# EAGLE board RFM69-ESP-03-v1.0-panel (EAGLE 7.7.0)
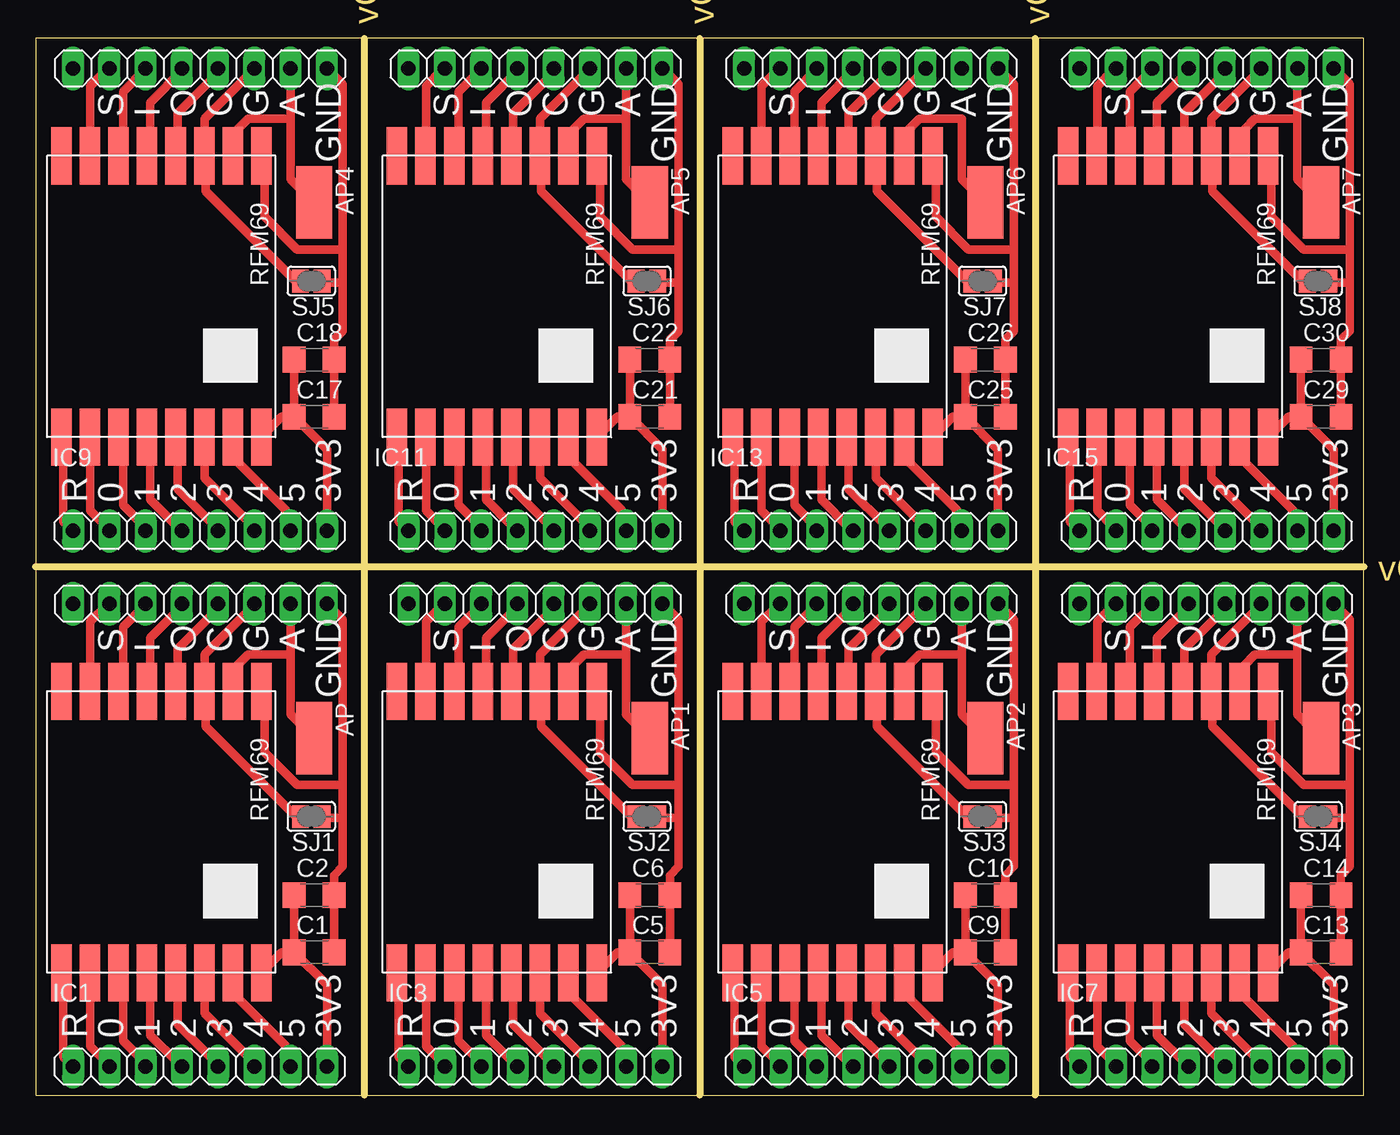
[diagram p0: board, top side]
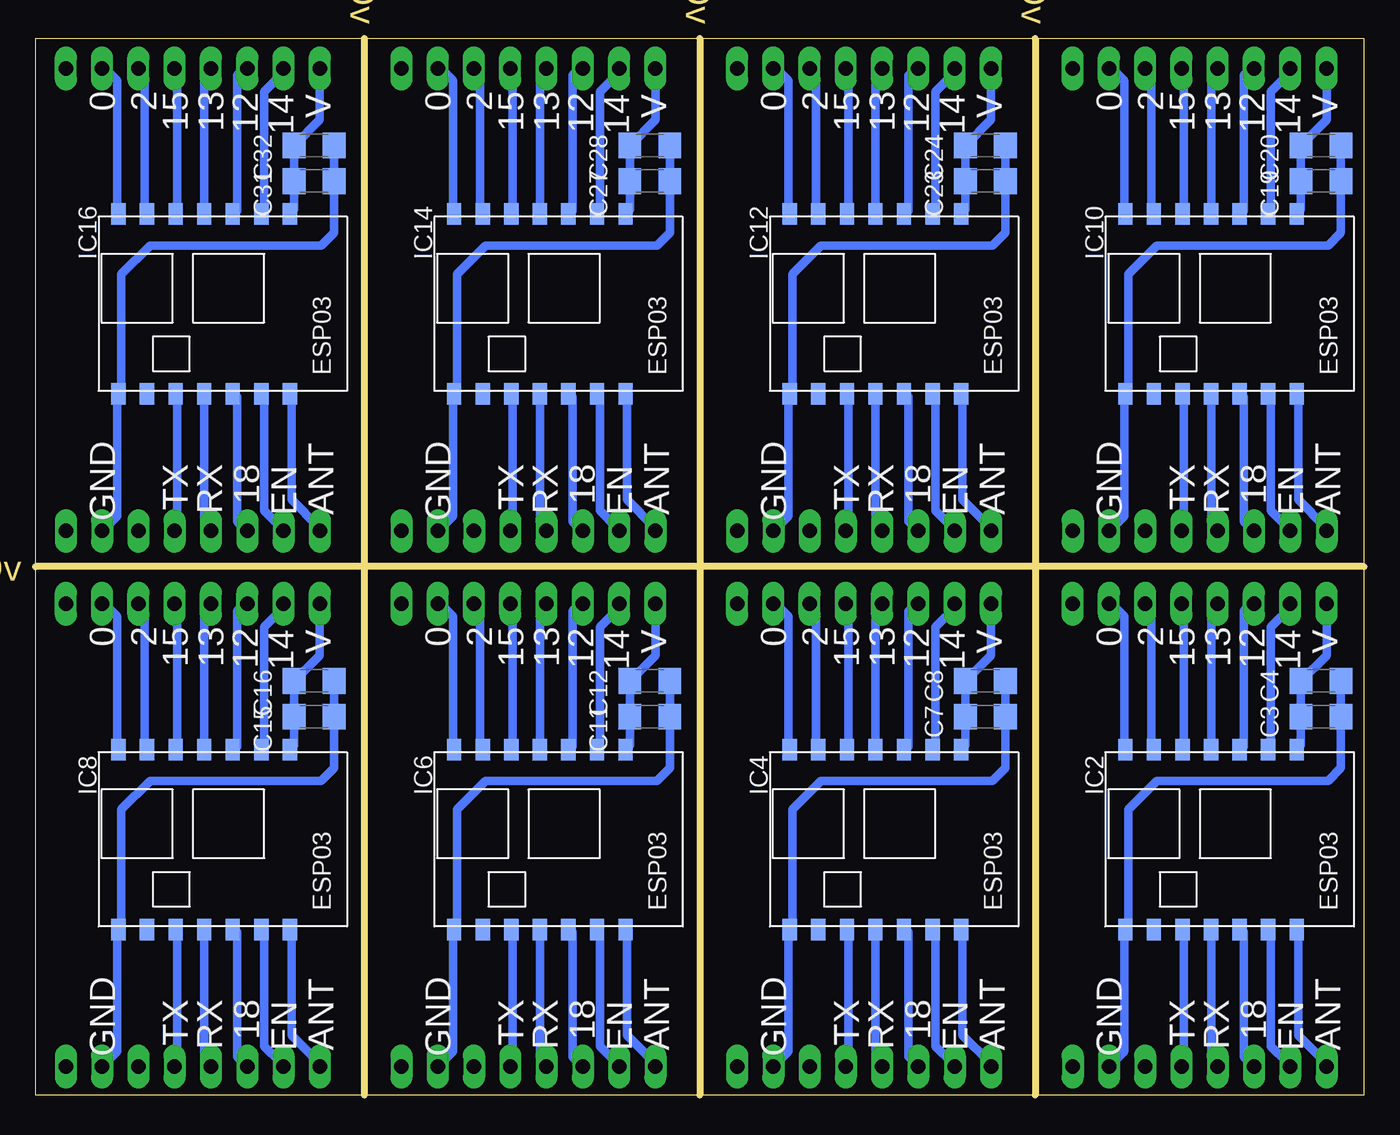
[diagram p1: board, bottom side, seen from below]

Size 93 x 74 mm. Coordinates in mm from the lower left corner, seen from the top.
Outline: 93,0 93,74 0,74 0,0 93,0
Copper layers (1*16): Top 0.035mm / dielectric 1.5mm / Bottom 0.035mm
Design rules "SeeedStudio_2layer_DRU_no_angle_20140221": minimum track width 6mil, minimum drill 12mil, track to track 6mil, track to pad 6mil, pad to pad 6mil, via to via 6mil, smd to smd 0mil, copper to edge 10mil, drill to drill 10mil, minimum pad ring 10mil, minimum via ring 6mil, stop-mask expansion 2mil, vias tented up to drill 100mil, thermal gap 10mil
Net classes: 0 default: width 0.61 mm
Milling: 4 lines

## Footprints (pad centres in the part's own frame; a part is rotated, then mirrored left to right if it is on the bottom)
SMD2,54-5,08 = smd 2.54 x 5.08: 1 0,0
C1206 = smd 1.6 x 1.8: 1 -1.4,0; 2 1.4,0
RFM69 = smd 4 x 1.44: 3V3 0,1; ANA 19.7,3; DIO0 0,13; DIO1 0,11; DIO2 0,9; DIO3 0,7; DIO4 0,5; DIO5 0,3; GND@1 19.7,5; GND@2 19.7,1; MISO 19.7,9; MOSI 19.7,11; NC 19.7,15; NSS 19.7,13; RST 0,15; SCK 19.7,7
ESP-03 = smd 1.5 x 1: ANT 7.4,4.8; CH_PD 7.4,2.8; GND 7.4,-7.2; GPIO0 -5.2,-7.2; GPIO2 -5.2,-5.2; GPIO12 -5.2,0.8; GPIO13 -5.2,-1.2; GPIO14 -5.2,2.8; GPIO15 -5.2,-3.2; GPIO18 7.4,0.8; NC 7.4,-5.2; URXD 7.4,-1.2; UTXD 7.4,-3.2; VCC -5.2,4.8
1X08 = drill 1.016 long: 1 -8.89,0; 2 -6.35,0; 3 -3.81,0; 4 -1.27,0; 5 1.27,0; 6 3.81,0; 7 6.35,0; 8 8.89,0
SJ = smd 1.168 x 1.6: 1 -0.762,0; 2 0.762,0

## Placement (x,y rotation side)
AP  [SMD2,54-5,08]  19.5,25 180 top
AP1  [SMD2,54-5,08]  43,25 180 top
AP2  [SMD2,54-5,08]  66.5,25 180 top
AP3  [SMD2,54-5,08]  90,25 180 top
AP4  [SMD2,54-5,08]  19.5,62.5 180 top
AP5  [SMD2,54-5,08]  43,62.5 180 top
AP6  [SMD2,54-5,08]  66.5,62.5 180 top
AP7  [SMD2,54-5,08]  90,62.5 180 top
C1  10uF  [C1206]  19.5,10 0 top
C2  0.1uF  [C1206]  19.5,14 0 top
C3  0.1uF  [C1206]  3,26.5 0 bottom
C4  470uF  [C1206]  3,29 0 bottom
C5  10uF  [C1206]  43,10 0 top
C6  0.1uF  [C1206]  43,14 0 top
C7  0.1uF  [C1206]  26.5,26.5 0 bottom
C8  470uF  [C1206]  26.5,29 0 bottom
C9  10uF  [C1206]  66.5,10 0 top
C10  0.1uF  [C1206]  66.5,14 0 top
C11  0.1uF  [C1206]  50,26.5 0 bottom
C12  470uF  [C1206]  50,29 0 bottom
C13  10uF  [C1206]  90,10 0 top
C14  0.1uF  [C1206]  90,14 0 top
C15  0.1uF  [C1206]  73.5,26.5 0 bottom
C16  470uF  [C1206]  73.5,29 0 bottom
C17  10uF  [C1206]  19.5,47.5 0 top
C18  0.1uF  [C1206]  19.5,51.5 0 top
C19  0.1uF  [C1206]  3,64 0 bottom
C20  470uF  [C1206]  3,66.5 0 bottom
C21  10uF  [C1206]  43,47.5 0 top
C22  0.1uF  [C1206]  43,51.5 0 top
C23  0.1uF  [C1206]  26.5,64 0 bottom
C24  470uF  [C1206]  26.5,66.5 0 bottom
C25  10uF  [C1206]  66.5,47.5 0 top
C26  0.1uF  [C1206]  66.5,51.5 0 top
C27  0.1uF  [C1206]  50,64 0 bottom
C28  470uF  [C1206]  50,66.5 0 bottom
C29  10uF  [C1206]  90,47.5 0 top
C30  0.1uF  [C1206]  90,51.5 0 top
C31  0.1uF  [C1206]  73.5,64 0 bottom
C32  470uF  [C1206]  73.5,66.5 0 bottom
IC1  RFM69HW  [RFM69]  16.8,8.57 90 top
IC2  ESP-03  [ESP-03]  9.5,19 270 bottom
IC3  RFM69HW  [RFM69]  40.3,8.57 90 top
IC4  ESP-03  [ESP-03]  33,19 270 bottom
IC5  RFM69HW  [RFM69]  63.8,8.57 90 top
IC6  ESP-03  [ESP-03]  56.5,19 270 bottom
IC7  RFM69HW  [RFM69]  87.3,8.57 90 top
IC8  ESP-03  [ESP-03]  80,19 270 bottom
IC9  RFM69HW  [RFM69]  16.8,46.07 90 top
IC10  ESP-03  [ESP-03]  9.5,56.5 270 bottom
IC11  RFM69HW  [RFM69]  40.3,46.07 90 top
IC12  ESP-03  [ESP-03]  33,56.5 270 bottom
IC13  RFM69HW  [RFM69]  63.8,46.07 90 top
IC14  ESP-03  [ESP-03]  56.5,56.5 270 bottom
IC15  RFM69HW  [RFM69]  87.3,46.07 90 top
IC16  ESP-03  [ESP-03]  80,56.5 270 bottom
JP1  [1X08]  11.5,34.4 0 top
JP2  [1X08]  35,34.4 0 top
JP3  [1X08]  11.5,2 180 top
JP4  [1X08]  35,2 180 top
JP5  [1X08]  58.5,34.4 0 top
JP6  [1X08]  58.5,2 180 top
JP7  [1X08]  82,34.4 0 top
JP8  [1X08]  82,2 180 top
JP9  [1X08]  11.5,71.9 0 top
JP10  [1X08]  11.5,39.5 180 top
JP11  [1X08]  35,71.9 0 top
JP12  [1X08]  35,39.5 180 top
JP13  [1X08]  58.5,71.9 0 top
JP14  [1X08]  58.5,39.5 180 top
JP15  [1X08]  82,71.9 0 top
JP16  [1X08]  82,39.5 180 top
SJ1  [SJ]  19.3,19.5 180 top
SJ2  [SJ]  42.8,19.5 180 top
SJ3  [SJ]  66.3,19.5 180 top
SJ4  [SJ]  89.8,19.5 180 top
SJ5  [SJ]  19.3,57 180 top
SJ6  [SJ]  42.8,57 180 top
SJ7  [SJ]  66.3,57 180 top
SJ8  [SJ]  89.8,57 180 top

## Library data of the parts
AP AP1-AP7 = wirepad
C1-C32 = rcl
IC1-IC16 = kiall
JP1-JP16 = pinhead
SJ1-SJ8 = jumper

## Nets
+3V1: C5.1 C6.1 IC3.3V3 JP4.1
+3V2: C9.1 C10.1 IC5.3V3 JP6.1
+3V3: C1.1 C2.1 IC1.3V3 JP3.1
+3V4: C13.1 C14.1 IC7.3V3 JP8.1
+3V5: C17.1 C18.1 IC9.3V3 JP10.1
+3V6: C21.1 C22.1 IC11.3V3 JP12.1
+3V7: C25.1 C26.1 IC13.3V3 JP14.1
+3V8: C29.1 C30.1 IC15.3V3 JP16.1
N$1: IC1.NSS IC2.GPIO14 JP1.2
N$2: IC1.MOSI IC2.GPIO12 JP1.3
N$3: IC1.MISO IC2.GPIO13 JP1.4
N$4: IC1.SCK IC2.GPIO15 JP1.5
N$5: AP.1 IC1.ANA IC2.GPIO0 JP1.7
N$6: C3.1 C4.1 IC2.VCC JP1.1
N$7: IC1.GND@1 IC2.GPIO2 JP1.6 SJ1.2
N$8: IC1.RST IC2.ANT JP3.8
N$9: IC1.DIO0 IC2.CH_PD JP3.7
N$10: IC1.DIO1 IC2.GPIO18 JP3.6
N$11: IC1.DIO2 IC2.URXD JP3.5
N$12: IC1.DIO3 IC2.UTXD JP3.4
N$13: IC1.DIO4 JP3.3
N$14: IC15.NSS IC16.GPIO14 JP15.2
N$15: C1.2 C2.2 IC1.GND@2 JP1.8 SJ1.1
N$16: C3.2 C4.2 IC1.DIO5 IC2.GND JP3.2
N$17: IC15.MOSI IC16.GPIO12 JP15.3
N$18: IC15.MISO IC16.GPIO13 JP15.4
N$19: IC15.SCK IC16.GPIO15 JP15.5
N$20: IC3.NSS IC4.GPIO14 JP2.2
N$21: IC3.MOSI IC4.GPIO12 JP2.3
N$22: IC15.RST IC16.ANT JP16.8
N$23: IC15.DIO0 IC16.CH_PD JP16.7
N$24: IC15.DIO1 IC16.GPIO18 JP16.6
N$25: IC3.MISO IC4.GPIO13 JP2.4
N$26: IC3.SCK IC4.GPIO15 JP2.5
N$27: IC3.RST IC4.ANT JP4.8
N$28: IC3.DIO0 IC4.CH_PD JP4.7
N$29: IC3.DIO1 IC4.GPIO18 JP4.6
N$30: IC3.DIO2 IC4.URXD JP4.5
N$31: IC5.NSS IC6.GPIO14 JP5.2
N$32: IC5.MOSI IC6.GPIO12 JP5.3
N$33: IC5.MISO IC6.GPIO13 JP5.4
N$34: IC5.SCK IC6.GPIO15 JP5.5
N$35: IC5.RST IC6.ANT JP6.8
N$36: IC5.DIO0 IC6.CH_PD JP6.7
N$37: IC5.DIO1 IC6.GPIO18 JP6.6
N$38: IC5.DIO2 IC6.URXD JP6.5
N$39: IC5.DIO3 IC6.UTXD JP6.4
N$40: IC5.DIO4 JP6.3
N$41: AP2.1 IC5.ANA IC6.GPIO0 JP5.7
N$42: C11.1 C12.1 IC6.VCC JP5.1
N$43: C9.2 C10.2 IC5.GND@2 JP5.8 SJ3.1
N$44: IC5.GND@1 IC6.GPIO2 JP5.6 SJ3.2
N$45: C11.2 C12.2 IC5.DIO5 IC6.GND JP6.2
N$46: IC7.NSS IC8.GPIO14 JP7.2
N$47: IC7.MOSI IC8.GPIO12 JP7.3
N$48: IC7.MISO IC8.GPIO13 JP7.4
N$49: IC7.SCK IC8.GPIO15 JP7.5
N$50: IC7.RST IC8.ANT JP8.8
N$51: IC7.DIO0 IC8.CH_PD JP8.7
N$52: IC7.DIO1 IC8.GPIO18 JP8.6
N$53: IC7.DIO2 IC8.URXD JP8.5
N$54: IC7.DIO3 IC8.UTXD JP8.4
N$55: IC7.DIO4 JP8.3
N$56: AP3.1 IC7.ANA IC8.GPIO0 JP7.7
N$57: C15.1 C16.1 IC8.VCC JP7.1
N$58: C13.2 C14.2 IC7.GND@2 JP7.8 SJ4.1
N$59: IC7.GND@1 IC8.GPIO2 JP7.6 SJ4.2
N$60: C15.2 C16.2 IC7.DIO5 IC8.GND JP8.2
N$61: IC9.NSS IC10.GPIO14 JP9.2
N$62: IC9.MOSI IC10.GPIO12 JP9.3
N$63: IC9.MISO IC10.GPIO13 JP9.4
N$64: IC9.SCK IC10.GPIO15 JP9.5
N$65: IC9.RST IC10.ANT JP10.8
N$66: IC9.DIO0 IC10.CH_PD JP10.7
N$67: IC9.DIO1 IC10.GPIO18 JP10.6
N$68: IC9.DIO2 IC10.URXD JP10.5
N$69: IC9.DIO3 IC10.UTXD JP10.4
N$70: IC9.DIO4 JP10.3
N$71: AP4.1 IC9.ANA IC10.GPIO0 JP9.7
N$72: C19.1 C20.1 IC10.VCC JP9.1
N$73: C17.2 C18.2 IC9.GND@2 JP9.8 SJ5.1
N$74: IC9.GND@1 IC10.GPIO2 JP9.6 SJ5.2
N$75: C19.2 C20.2 IC9.DIO5 IC10.GND JP10.2
N$76: IC11.NSS IC12.GPIO14 JP11.2
N$77: IC11.MOSI IC12.GPIO12 JP11.3
N$78: IC11.MISO IC12.GPIO13 JP11.4
N$79: IC11.SCK IC12.GPIO15 JP11.5
N$80: IC11.RST IC12.ANT JP12.8
N$81: IC11.DIO0 IC12.CH_PD JP12.7
N$82: IC11.DIO1 IC12.GPIO18 JP12.6
N$83: IC11.DIO2 IC12.URXD JP12.5
N$84: IC11.DIO3 IC12.UTXD JP12.4
N$85: IC11.DIO4 JP12.3
N$86: AP5.1 IC11.ANA IC12.GPIO0 JP11.7
N$87: C23.1 C24.1 IC12.VCC JP11.1
N$88: C21.2 C22.2 IC11.GND@2 JP11.8 SJ6.1
N$89: IC11.GND@1 IC12.GPIO2 JP11.6 SJ6.2
N$90: C23.2 C24.2 IC11.DIO5 IC12.GND JP12.2
N$91: IC13.NSS IC14.GPIO14 JP13.2
N$92: IC13.MOSI IC14.GPIO12 JP13.3
N$93: IC13.MISO IC14.GPIO13 JP13.4
N$94: IC13.SCK IC14.GPIO15 JP13.5
N$95: IC13.RST IC14.ANT JP14.8
N$96: IC13.DIO0 IC14.CH_PD JP14.7
N$97: IC13.DIO1 IC14.GPIO18 JP14.6
N$98: IC13.DIO2 IC14.URXD JP14.5
N$99: IC13.DIO3 IC14.UTXD JP14.4
N$100: IC13.DIO4 JP14.3
N$101: IC14.GPIO0 JP13.7
N$102: C27.1 C28.1 IC14.VCC JP13.1
N$103: C25.2 C26.2 IC13.GND@2 JP13.8 SJ7.1
N$104: IC13.GND@1 IC14.GPIO2 JP13.6 SJ7.2
N$105: C27.2 C28.2 IC13.DIO5 IC14.GND JP14.2
N$106: IC15.DIO2 IC16.URXD JP16.5
N$107: IC15.DIO3 IC16.UTXD JP16.4
N$108: IC15.DIO4 JP16.3
N$109: AP7.1 IC15.ANA IC16.GPIO0 JP15.7
N$110: C31.1 C32.1 IC16.VCC JP15.1
N$111: C29.2 C30.2 IC15.GND@2 JP15.8 SJ8.1
N$112: IC15.GND@1 IC16.GPIO2 JP15.6 SJ8.2
N$113: C31.2 C32.2 IC15.DIO5 IC16.GND JP16.2
N$121: IC3.DIO3 IC4.UTXD JP4.4
N$122: IC3.DIO4 JP4.3
N$123: AP1.1 IC3.ANA IC4.GPIO0 JP2.7
N$124: C7.1 C8.1 IC4.VCC JP2.1
N$125: C5.2 C6.2 IC3.GND@2 JP2.8 SJ2.1
N$126: IC3.GND@1 IC4.GPIO2 JP2.6 SJ2.2
N$127: C7.2 C8.2 IC3.DIO5 IC4.GND JP4.2
S$2: AP6.1 IC13.ANA

## Tracks (layer width: path | path; a pad name or v marks a point on that pad's centre or on a via)
+3V1
  Top 0.61: JP4.1 43.89,7.71 C5.1 | C5.1 40.73,10 IC3.3V3 | C6.1 C5.1
+3V2
  Top 0.61: JP6.1 67.39,7.71 C9.1 | C9.1 64.23,10 IC5.3V3 | C10.1 C9.1
+3V3
  Top 0.61: JP3.1 20.39,7.71 C1.1 | C1.1 17.23,10 IC1.3V3 | C2.1 C1.1
+3V4
  Top 0.61: JP8.1 90.89,7.71 C13.1 | C13.1 87.73,10 IC7.3V3 | C14.1 C13.1
+3V5
  Top 0.61: JP10.1 20.39,45.21 C17.1 | C17.1 17.23,47.5 IC9.3V3 | C18.1 C17.1
+3V6
  Top 0.61: JP12.1 43.89,45.21 C21.1 | C21.1 40.73,47.5 IC11.3V3 | C22.1 C21.1
+3V7
  Top 0.61: JP14.1 67.39,45.21 C25.1 | C25.1 64.23,47.5 IC13.3V3 | C26.1 C25.1
+3V8
  Top 0.61: JP16.1 90.89,45.21 C29.1 | C29.1 87.73,47.5 IC15.3V3 | C30.1 C29.1
N$1
  Top 0.61: IC1.NSS 3.83,28.57 3.83,33.15 4.97,34.29 JP1.2
  Bottom 0.61: IC2.GPIO14 6.5,24.38 6.5,32.77 4.97,34.29 JP1.2
N$2
  Top 0.61: IC1.MOSI 6.12,28.57 6.12,32.77 7.64,34.29 JP1.3
  Bottom 0.61: IC2.GPIO12 8.4,24.38 8.4,33.91 8.02,34.29 JP1.3
N$3
  Top 0.61: IC1.MISO 8.02,28.57 8.02,32 10.31,34.29 JP1.4
  Bottom 0.61: IC2.GPIO13 10.69,24.38 10.69,33.91 10.31,34.29 JP1.4
N$4
  Top 0.61: IC1.SCK 9.93,28.57 9.93,31.24 12.97,34.29 JP1.5
  Bottom 0.61: IC2.GPIO15 12.59,24.38 12.59,34.29 JP1.5
N$5
  Top 0.61: JP1.7 17.85,30.86 | 17.85,30.86 14.88,30.86 14.12,30.1 14.12,28.57 IC1.ANA | 17.85,30.86 17.85,26.65 AP.1
  Bottom 0.61: IC2.GPIO0 16.79,24.38 16.79,33.53 17.55,34.29 JP1.7
N$6
  Bottom 0.61: JP1.1 2.61,30.79 C4.1 4.4,26.67 | 4.4,26.67 C3.1 | C3.1 4.4,24.5 IC2.VCC | C3.1 4.21,26.67 4.4,26.67
N$7
  Top 0.61: JP1.6 15.26,34.29 11.83,30.86 11.83,28.57 IC1.GND@1 11.9,28.17 11.9,25.8 18.2,19.5 SJ1.2
  Bottom 0.61: IC2.GPIO2 14.88,24.38 14.88,33.91 15.26,34.29 JP1.6
N$8
  Top 0.61: IC1.RST 1.93,8.38 1.93,2.67 2.31,2.29 JP3.8
  Bottom 0.61: IC2.ANT 4.59,11.43 4.59,4.19 2.69,2.29 JP3.8
N$9
  Top 0.61: IC1.DIO0 3.83,8.38 3.83,3.43 4.97,2.29 JP3.7
  Bottom 0.61: IC2.CH_PD 6.5,11.43 6.5,3.43 5.36,2.29 JP3.7
N$10
  Top 0.61: IC1.DIO1 6.12,8.38 6.12,3.81 7.64,2.29 JP3.6
  Bottom 0.61: IC2.GPIO18 8.4,11.43 8.4,2.67 8.02,2.29 JP3.6
N$11
  Top 0.61: IC1.DIO2 8.02,8.38 8.02,4.19 9.93,2.29 JP3.5
  Bottom 0.61: IC2.URXD 10.69,11.43 10.69,2.67 10.31,2.29 JP3.5
N$12
  Top 0.61: IC1.DIO3 9.93,8.38 9.93,4.95 12.59,2.29 JP3.4
  Bottom 0.61: IC2.UTXD 12.59,11.43 12.59,2.29 JP3.4
N$13
  Top 0.61: IC1.DIO4 11.83,8.38 11.83,5.71 15.26,2.29 JP3.3
N$14
  Top 0.61: IC15.NSS 74.33,66.08 74.33,70.65 75.47,71.79 JP15.2
  Bottom 0.61: IC16.GPIO14 77,61.88 77,70.27 75.47,71.79 JP15.2
N$15
  Top 0.61: C1.2 C2.2 20.9,15.4 21.5,16 21.5,19.4 | 21.5,19.4 21.5,21.72 | 21.5,21.72 21.5,33.29 JP1.8 | 21.5,21.72 18.31,21.72 16.02,24 16.02,28.19 IC1.GND@2 | SJ1.1 20.06,19.4 21.5,19.4
N$16
  Top 0.61: JP3.2 17.55,2.29 17.55,3.43 14.12,6.86 14.12,8.38 IC1.DIO5
  Bottom 0.61: JP3.2 17.55,2.29 16.79,3.05 16.79,11.43 IC2.GND 16.5,11.8 16.5,20 14.5,22 2.5,22 1.6,22.9 C3.2 C4.2
N$17
  Top 0.61: IC15.MOSI 76.62,66.08 76.62,70.27 78.14,71.79 JP15.3
  Bottom 0.61: IC16.GPIO12 78.9,61.88 78.9,71.41 78.52,71.79 JP15.3
N$18
  Top 0.61: IC15.MISO 78.52,66.08 78.52,69.5 80.81,71.79 JP15.4
  Bottom 0.61: IC16.GPIO13 81.19,61.88 81.19,71.41 80.81,71.79 JP15.4
N$19
  Top 0.61: IC15.SCK 80.43,66.08 80.43,68.74 83.47,71.79 JP15.5
  Bottom 0.61: IC16.GPIO15 83.09,61.88 83.09,71.79 JP15.5
N$20
  Top 0.61: IC3.NSS 27.33,28.57 27.33,33.15 28.47,34.29 JP2.2
  Bottom 0.61: IC4.GPIO14 30,24.38 30,32.77 28.47,34.29 JP2.2
N$21
  Top 0.61: IC3.MOSI 29.62,28.57 29.62,32.77 31.14,34.29 JP2.3
  Bottom 0.61: IC4.GPIO12 31.9,24.38 31.9,33.91 31.52,34.29 JP2.3
N$22
  Top 0.61: IC15.RST 72.43,45.88 72.43,40.17 72.81,39.79 JP16.8
  Bottom 0.61: IC16.ANT 75.09,48.93 75.09,41.69 73.19,39.79 JP16.8
N$23
  Top 0.61: IC15.DIO0 74.33,45.88 74.33,40.93 75.47,39.79 JP16.7
  Bottom 0.61: IC16.CH_PD 77,48.93 77,40.93 75.86,39.79 JP16.7
N$24
  Top 0.61: IC15.DIO1 76.62,45.88 76.62,41.31 78.14,39.79 JP16.6
  Bottom 0.61: IC16.GPIO18 78.9,48.93 78.9,40.17 78.52,39.79 JP16.6
N$25
  Top 0.61: IC3.MISO 31.52,28.57 31.52,32 33.81,34.29 JP2.4
  Bottom 0.61: IC4.GPIO13 34.19,24.38 34.19,33.91 33.81,34.29 JP2.4
N$26
  Top 0.61: IC3.SCK 33.43,28.57 33.43,31.24 36.48,34.29 JP2.5
  Bottom 0.61: IC4.GPIO15 36.09,24.38 36.09,34.29 JP2.5
N$27
  Top 0.61: IC3.RST 25.43,8.38 25.43,2.67 25.81,2.29 JP4.8
  Bottom 0.61: IC4.ANT 28.09,11.43 28.09,4.19 26.19,2.29 JP4.8
N$28
  Top 0.61: IC3.DIO0 27.33,8.38 27.33,3.43 28.47,2.29 JP4.7
  Bottom 0.61: IC4.CH_PD 30,11.43 30,3.43 28.86,2.29 JP4.7
N$29
  Top 0.61: IC3.DIO1 29.62,8.38 29.62,3.81 31.14,2.29 JP4.6
  Bottom 0.61: IC4.GPIO18 31.9,11.43 31.9,2.67 31.52,2.29 JP4.6
N$30
  Top 0.61: IC3.DIO2 31.52,8.38 31.52,4.19 33.43,2.29 JP4.5
  Bottom 0.61: IC4.URXD 34.19,11.43 34.19,2.67 33.81,2.29 JP4.5
N$31
  Top 0.61: IC5.NSS 50.83,28.57 50.83,33.15 51.97,34.29 JP5.2
  Bottom 0.61: IC6.GPIO14 53.5,24.38 53.5,32.77 51.97,34.29 JP5.2
N$32
  Top 0.61: IC5.MOSI 53.12,28.57 53.12,32.77 54.64,34.29 JP5.3
  Bottom 0.61: IC6.GPIO12 55.4,24.38 55.4,33.91 55.02,34.29 JP5.3
N$33
  Top 0.61: IC5.MISO 55.02,28.57 55.02,32 57.31,34.29 JP5.4
  Bottom 0.61: IC6.GPIO13 57.69,24.38 57.69,33.91 57.31,34.29 JP5.4
N$34
  Top 0.61: IC5.SCK 56.93,28.57 56.93,31.24 59.98,34.29 JP5.5
  Bottom 0.61: IC6.GPIO15 59.59,24.38 59.59,34.29 JP5.5
N$35
  Top 0.61: IC5.RST 48.93,8.38 48.93,2.67 49.31,2.29 JP6.8
  Bottom 0.61: IC6.ANT 51.59,11.43 51.59,4.19 49.69,2.29 JP6.8
N$36
  Top 0.61: IC5.DIO0 50.83,8.38 50.83,3.43 51.97,2.29 JP6.7
  Bottom 0.61: IC6.CH_PD 53.5,11.43 53.5,3.43 52.35,2.29 JP6.7
N$37
  Top 0.61: IC5.DIO1 53.12,8.38 53.12,3.81 54.64,2.29 JP6.6
  Bottom 0.61: IC6.GPIO18 55.4,11.43 55.4,2.67 55.02,2.29 JP6.6
N$38
  Top 0.61: IC5.DIO2 55.02,8.38 55.02,4.19 56.93,2.29 JP6.5
  Bottom 0.61: IC6.URXD 57.69,11.43 57.69,2.67 57.31,2.29 JP6.5
N$39
  Top 0.61: IC5.DIO3 56.93,8.38 56.93,4.95 59.59,2.29 JP6.4
  Bottom 0.61: IC6.UTXD 59.59,11.43 59.59,2.29 JP6.4
N$40
  Top 0.61: IC5.DIO4 58.83,8.38 58.83,5.71 62.26,2.29 JP6.3
N$41
  Top 0.61: JP5.7 64.85,30.86 | 64.85,30.86 61.88,30.86 61.12,30.1 61.12,28.57 IC5.ANA | 64.85,30.86 64.85,26.65 AP2.1
  Bottom 0.61: IC6.GPIO0 63.78,24.38 63.78,33.53 64.55,34.29 JP5.7
N$42
  Bottom 0.61: JP5.1 49.61,30.79 C12.1 51.4,26.67 | 51.4,26.67 C11.1 | C11.1 51.4,24.5 IC6.VCC | C11.1 51.21,26.67 51.4,26.67
N$43
  Top 0.61: C9.2 C10.2 67.9,15.4 68.5,16 68.5,19.4 | 68.5,19.4 68.5,21.72 | 68.5,21.72 68.5,33.29 JP5.8 | 68.5,21.72 65.31,21.72 63.02,24 63.02,28.19 IC5.GND@2 | SJ3.1 67.06,19.4 68.5,19.4
N$44
  Top 0.61: JP5.6 62.26,34.29 58.83,30.86 58.83,28.57 IC5.GND@1 58.9,28.17 58.9,25.8 65.2,19.5 SJ3.2
  Bottom 0.61: IC6.GPIO2 61.88,24.38 61.88,33.91 62.26,34.29 JP5.6
N$45
  Top 0.61: JP6.2 64.55,2.29 64.55,3.43 61.12,6.86 61.12,8.38 IC5.DIO5
  Bottom 0.61: JP6.2 64.55,2.29 63.78,3.05 63.78,11.43 IC6.GND 63.5,11.8 63.5,20 61.5,22 49.5,22 48.6,22.9 C11.2 C12.2
N$46
  Top 0.61: IC7.NSS 74.33,28.57 74.33,33.15 75.47,34.29 JP7.2
  Bottom 0.61: IC8.GPIO14 77,24.38 77,32.77 75.47,34.29 JP7.2
N$47
  Top 0.61: IC7.MOSI 76.62,28.57 76.62,32.77 78.14,34.29 JP7.3
  Bottom 0.61: IC8.GPIO12 78.9,24.38 78.9,33.91 78.52,34.29 JP7.3
N$48
  Top 0.61: IC7.MISO 78.52,28.57 78.52,32 80.81,34.29 JP7.4
  Bottom 0.61: IC8.GPIO13 81.19,24.38 81.19,33.91 80.81,34.29 JP7.4
N$49
  Top 0.61: IC7.SCK 80.43,28.57 80.43,31.24 83.47,34.29 JP7.5
  Bottom 0.61: IC8.GPIO15 83.09,24.38 83.09,34.29 JP7.5
N$50
  Top 0.61: IC7.RST 72.43,8.38 72.43,2.67 72.81,2.29 JP8.8
  Bottom 0.61: IC8.ANT 75.09,11.43 75.09,4.19 73.19,2.29 JP8.8
N$51
  Top 0.61: IC7.DIO0 74.33,8.38 74.33,3.43 75.47,2.29 JP8.7
  Bottom 0.61: IC8.CH_PD 77,11.43 77,3.43 75.86,2.29 JP8.7
N$52
  Top 0.61: IC7.DIO1 76.62,8.38 76.62,3.81 78.14,2.29 JP8.6
  Bottom 0.61: IC8.GPIO18 78.9,11.43 78.9,2.67 78.52,2.29 JP8.6
N$53
  Top 0.61: IC7.DIO2 78.52,8.38 78.52,4.19 80.43,2.29 JP8.5
  Bottom 0.61: IC8.URXD 81.19,11.43 81.19,2.67 80.81,2.29 JP8.5
N$54
  Top 0.61: IC7.DIO3 80.43,8.38 80.43,4.95 83.09,2.29 JP8.4
  Bottom 0.61: IC8.UTXD 83.09,11.43 83.09,2.29 JP8.4
N$55
  Top 0.61: IC7.DIO4 82.33,8.38 82.33,5.71 85.76,2.29 JP8.3
N$56
  Top 0.61: JP7.7 88.35,30.86 | 88.35,30.86 85.38,30.86 84.62,30.1 84.62,28.57 IC7.ANA | 88.35,30.86 88.35,26.65 AP3.1
  Bottom 0.61: IC8.GPIO0 87.28,24.38 87.28,33.53 88.05,34.29 JP7.7
N$57
  Bottom 0.61: JP7.1 73.11,30.79 C16.1 74.9,26.67 | 74.9,26.67 C15.1 | C15.1 74.9,24.5 IC8.VCC | C15.1 74.71,26.67 74.9,26.67
N$58
  Top 0.61: C13.2 C14.2 91.4,15.4 92,16 92,19.4 | 92,19.4 92,21.72 | 92,21.72 92,33.29 JP7.8 | 92,21.72 88.81,21.72 86.52,24 86.52,28.19 IC7.GND@2 | SJ4.1 90.56,19.4 92,19.4
N$59
  Top 0.61: JP7.6 85.76,34.29 82.33,30.86 82.33,28.57 IC7.GND@1 82.4,28.17 82.4,25.8 88.7,19.5 SJ4.2
  Bottom 0.61: IC8.GPIO2 85.38,24.38 85.38,33.91 85.76,34.29 JP7.6
N$60
  Top 0.61: JP8.2 88.05,2.29 88.05,3.43 84.62,6.86 84.62,8.38 IC7.DIO5
  Bottom 0.61: JP8.2 88.05,2.29 87.28,3.05 87.28,11.43 IC8.GND 87,11.8 87,20 85,22 73,22 72.1,22.9 C15.2 C16.2
N$61
  Top 0.61: IC9.NSS 3.83,66.08 3.83,70.65 4.97,71.79 JP9.2
  Bottom 0.61: IC10.GPIO14 6.5,61.88 6.5,70.27 4.97,71.79 JP9.2
N$62
  Top 0.61: IC9.MOSI 6.12,66.08 6.12,70.27 7.64,71.79 JP9.3
  Bottom 0.61: IC10.GPIO12 8.4,61.88 8.4,71.41 8.02,71.79 JP9.3
N$63
  Top 0.61: IC9.MISO 8.02,66.08 8.02,69.5 10.31,71.79 JP9.4
  Bottom 0.61: IC10.GPIO13 10.69,61.88 10.69,71.41 10.31,71.79 JP9.4
N$64
  Top 0.61: IC9.SCK 9.93,66.08 9.93,68.74 12.97,71.79 JP9.5
  Bottom 0.61: IC10.GPIO15 12.59,61.88 12.59,71.79 JP9.5
N$65
  Top 0.61: IC9.RST 1.93,45.88 1.93,40.17 2.31,39.79 JP10.8
  Bottom 0.61: IC10.ANT 4.59,48.93 4.59,41.69 2.69,39.79 JP10.8
N$66
  Top 0.61: IC9.DIO0 3.83,45.88 3.83,40.93 4.97,39.79 JP10.7
  Bottom 0.61: IC10.CH_PD 6.5,48.93 6.5,40.93 5.36,39.79 JP10.7
N$67
  Top 0.61: IC9.DIO1 6.12,45.88 6.12,41.31 7.64,39.79 JP10.6
  Bottom 0.61: IC10.GPIO18 8.4,48.93 8.4,40.17 8.02,39.79 JP10.6
N$68
  Top 0.61: IC9.DIO2 8.02,45.88 8.02,41.69 9.93,39.79 JP10.5
  Bottom 0.61: IC10.URXD 10.69,48.93 10.69,40.17 10.31,39.79 JP10.5
N$69
  Top 0.61: IC9.DIO3 9.93,45.88 9.93,42.45 12.59,39.79 JP10.4
  Bottom 0.61: IC10.UTXD 12.59,48.93 12.59,39.79 JP10.4
N$70
  Top 0.61: IC9.DIO4 11.83,45.88 11.83,43.22 15.26,39.79 JP10.3
N$71
  Top 0.61: JP9.7 17.85,68.36 | 17.85,68.36 14.88,68.36 14.12,67.6 14.12,66.08 IC9.ANA | 17.85,68.36 17.85,64.15 AP4.1
  Bottom 0.61: IC10.GPIO0 16.79,61.88 16.79,71.03 17.55,71.79 JP9.7
N$72
  Bottom 0.61: JP9.1 2.61,68.29 C20.1 4.4,64.17 | 4.4,64.17 C19.1 | C19.1 4.4,62 IC10.VCC | C19.1 4.21,64.17 4.4,64.17
N$73
  Top 0.61: C17.2 C18.2 20.9,52.9 21.5,53.5 21.5,56.9 | 21.5,56.9 21.5,59.22 | 21.5,59.22 21.5,70.79 JP9.8 | 21.5,59.22 18.31,59.22 16.02,61.5 16.02,65.69 IC9.GND@2 | SJ5.1 20.06,56.9 21.5,56.9
N$74
  Top 0.61: JP9.6 15.26,71.79 11.83,68.36 11.83,66.08 IC9.GND@1 11.9,65.67 11.9,63.3 18.2,57 SJ5.2
  Bottom 0.61: IC10.GPIO2 14.88,61.88 14.88,71.41 15.26,71.79 JP9.6
N$75
  Top 0.61: JP10.2 17.55,39.79 17.55,40.93 14.12,44.36 14.12,45.88 IC9.DIO5
  Bottom 0.61: JP10.2 17.55,39.79 16.79,40.55 16.79,48.93 IC10.GND 16.5,49.3 16.5,57.5 14.5,59.5 2.5,59.5 1.6,60.4 C19.2 C20.2
N$76
  Top 0.61: IC11.NSS 27.33,66.08 27.33,70.65 28.47,71.79 JP11.2
  Bottom 0.61: IC12.GPIO14 30,61.88 30,70.27 28.47,71.79 JP11.2
N$77
  Top 0.61: IC11.MOSI 29.62,66.08 29.62,70.27 31.14,71.79 JP11.3
  Bottom 0.61: IC12.GPIO12 31.9,61.88 31.9,71.41 31.52,71.79 JP11.3
N$78
  Top 0.61: IC11.MISO 31.52,66.08 31.52,69.5 33.81,71.79 JP11.4
  Bottom 0.61: IC12.GPIO13 34.19,61.88 34.19,71.41 33.81,71.79 JP11.4
N$79
  Top 0.61: IC11.SCK 33.43,66.08 33.43,68.74 36.48,71.79 JP11.5
  Bottom 0.61: IC12.GPIO15 36.09,61.88 36.09,71.79 JP11.5
N$80
  Top 0.61: IC11.RST 25.43,45.88 25.43,40.17 25.81,39.79 JP12.8
  Bottom 0.61: IC12.ANT 28.09,48.93 28.09,41.69 26.19,39.79 JP12.8
N$81
  Top 0.61: IC11.DIO0 27.33,45.88 27.33,40.93 28.47,39.79 JP12.7
  Bottom 0.61: IC12.CH_PD 30,48.93 30,40.93 28.86,39.79 JP12.7
N$82
  Top 0.61: IC11.DIO1 29.62,45.88 29.62,41.31 31.14,39.79 JP12.6
  Bottom 0.61: IC12.GPIO18 31.9,48.93 31.9,40.17 31.52,39.79 JP12.6
N$83
  Top 0.61: IC11.DIO2 31.52,45.88 31.52,41.69 33.43,39.79 JP12.5
  Bottom 0.61: IC12.URXD 34.19,48.93 34.19,40.17 33.81,39.79 JP12.5
N$84
  Top 0.61: IC11.DIO3 33.43,45.88 33.43,42.45 36.09,39.79 JP12.4
  Bottom 0.61: IC12.UTXD 36.09,48.93 36.09,39.79 JP12.4
N$85
  Top 0.61: IC11.DIO4 35.33,45.88 35.33,43.22 38.76,39.79 JP12.3
N$86
  Top 0.61: JP11.7 41.35,68.36 | 41.35,68.36 38.38,68.36 37.62,67.6 37.62,66.08 IC11.ANA | 41.35,68.36 41.35,64.15 AP5.1
  Bottom 0.61: IC12.GPIO0 40.28,61.88 40.28,71.03 41.05,71.79 JP11.7
N$87
  Bottom 0.61: JP11.1 26.11,68.29 C24.1 27.9,64.17 | 27.9,64.17 C23.1 | C23.1 27.9,62 IC12.VCC | C23.1 27.71,64.17 27.9,64.17
N$88
  Top 0.61: C21.2 C22.2 44.4,52.9 45,53.5 45,56.9 | 45,56.9 45,59.22 | 45,59.22 45,70.79 JP11.8 | 45,59.22 41.81,59.22 39.52,61.5 39.52,65.69 IC11.GND@2 | SJ6.1 43.56,56.9 45,56.9
N$89
  Top 0.61: JP11.6 38.76,71.79 35.33,68.36 35.33,66.08 IC11.GND@1 35.4,65.67 35.4,63.3 41.7,57 SJ6.2
  Bottom 0.61: IC12.GPIO2 38.38,61.88 38.38,71.41 38.76,71.79 JP11.6
N$90
  Top 0.61: JP12.2 41.05,39.79 41.05,40.93 37.62,44.36 37.62,45.88 IC11.DIO5
  Bottom 0.61: JP12.2 41.05,39.79 40.28,40.55 40.28,48.93 IC12.GND 40,49.3 40,57.5 38,59.5 26,59.5 25.1,60.4 C23.2 C24.2
N$91
  Top 0.61: IC13.NSS 50.83,66.08 50.83,70.65 51.97,71.79 JP13.2
  Bottom 0.61: IC14.GPIO14 53.5,61.88 53.5,70.27 51.97,71.79 JP13.2
N$92
  Top 0.61: IC13.MOSI 53.12,66.08 53.12,70.27 54.64,71.79 JP13.3
  Bottom 0.61: IC14.GPIO12 55.4,61.88 55.4,71.41 55.02,71.79 JP13.3
N$93
  Top 0.61: IC13.MISO 55.02,66.08 55.02,69.5 57.31,71.79 JP13.4
  Bottom 0.61: IC14.GPIO13 57.69,61.88 57.69,71.41 57.31,71.79 JP13.4
N$94
  Top 0.61: IC13.SCK 56.93,66.08 56.93,68.74 59.98,71.79 JP13.5
  Bottom 0.61: IC14.GPIO15 59.59,61.88 59.59,71.79 JP13.5
N$95
  Top 0.61: IC13.RST 48.93,45.88 48.93,40.17 49.31,39.79 JP14.8
  Bottom 0.61: IC14.ANT 51.59,48.93 51.59,41.69 49.69,39.79 JP14.8
N$96
  Top 0.61: IC13.DIO0 50.83,45.88 50.83,40.93 51.97,39.79 JP14.7
  Bottom 0.61: IC14.CH_PD 53.5,48.93 53.5,40.93 52.35,39.79 JP14.7
N$97
  Top 0.61: IC13.DIO1 53.12,45.88 53.12,41.31 54.64,39.79 JP14.6
  Bottom 0.61: IC14.GPIO18 55.4,48.93 55.4,40.17 55.02,39.79 JP14.6
N$98
  Top 0.61: IC13.DIO2 55.02,45.88 55.02,41.69 56.93,39.79 JP14.5
  Bottom 0.61: IC14.URXD 57.69,48.93 57.69,40.17 57.31,39.79 JP14.5
N$99
  Top 0.61: IC13.DIO3 56.93,45.88 56.93,42.45 59.59,39.79 JP14.4
  Bottom 0.61: IC14.UTXD 59.59,48.93 59.59,39.79 JP14.4
N$100
  Top 0.61: IC13.DIO4 58.83,45.88 58.83,43.22 62.26,39.79 JP14.3
N$101
  Bottom 0.61: IC14.GPIO0 63.78,61.88 63.78,71.03 64.55,71.79 JP13.7
N$102
  Bottom 0.61: JP13.1 49.61,68.29 C28.1 51.4,64.17 | 51.4,64.17 C27.1 | C27.1 51.4,62 IC14.VCC | C27.1 51.21,64.17 51.4,64.17
N$103
  Top 0.61: C25.2 C26.2 67.9,52.9 68.5,53.5 68.5,56.9 | 68.5,56.9 68.5,59.22 | 68.5,59.22 68.5,70.79 JP13.8 | 68.5,59.22 65.31,59.22 63.02,61.5 63.02,65.69 IC13.GND@2 | SJ7.1 67.06,56.9 68.5,56.9
N$104
  Top 0.61: JP13.6 62.26,71.79 58.83,68.36 58.83,66.08 IC13.GND@1 58.9,65.67 58.9,63.3 65.2,57 SJ7.2
  Bottom 0.61: IC14.GPIO2 61.88,61.88 61.88,71.41 62.26,71.79 JP13.6
N$105
  Top 0.61: JP14.2 64.55,39.79 64.55,40.93 61.12,44.36 61.12,45.88 IC13.DIO5
  Bottom 0.61: JP14.2 64.55,39.79 63.78,40.55 63.78,48.93 IC14.GND 63.5,49.3 63.5,57.5 61.5,59.5 49.5,59.5 48.6,60.4 C27.2 C28.2
N$106
  Top 0.61: IC15.DIO2 78.52,45.88 78.52,41.69 80.43,39.79 JP16.5
  Bottom 0.61: IC16.URXD 81.19,48.93 81.19,40.17 80.81,39.79 JP16.5
N$107
  Top 0.61: IC15.DIO3 80.43,45.88 80.43,42.45 83.09,39.79 JP16.4
  Bottom 0.61: IC16.UTXD 83.09,48.93 83.09,39.79 JP16.4
N$108
  Top 0.61: IC15.DIO4 82.33,45.88 82.33,43.22 85.76,39.79 JP16.3
N$109
  Top 0.61: JP15.7 88.35,68.36 | 88.35,68.36 85.38,68.36 84.62,67.6 84.62,66.08 IC15.ANA | 88.35,68.36 88.35,64.15 AP7.1
  Bottom 0.61: IC16.GPIO0 87.28,61.88 87.28,71.03 88.05,71.79 JP15.7
N$110
  Bottom 0.61: JP15.1 73.11,68.29 C32.1 74.9,64.17 | 74.9,64.17 C31.1 | C31.1 74.9,62 IC16.VCC | C31.1 74.71,64.17 74.9,64.17
N$111
  Top 0.61: C29.2 C30.2 91.4,52.9 92,53.5 92,56.9 | 92,56.9 92,59.22 | 92,59.22 92,70.79 JP15.8 | 92,59.22 88.81,59.22 86.52,61.5 86.52,65.69 IC15.GND@2 | SJ8.1 90.56,56.9 92,56.9
N$112
  Top 0.61: JP15.6 85.76,71.79 82.33,68.36 82.33,66.08 IC15.GND@1 82.4,65.67 82.4,63.3 88.7,57 SJ8.2
  Bottom 0.61: IC16.GPIO2 85.38,61.88 85.38,71.41 85.76,71.79 JP15.6
N$113
  Top 0.61: JP16.2 88.05,39.79 88.05,40.93 84.62,44.36 84.62,45.88 IC15.DIO5
  Bottom 0.61: JP16.2 88.05,39.79 87.28,40.55 87.28,48.93 IC16.GND 87,49.3 87,57.5 85,59.5 73,59.5 72.1,60.4 C31.2 C32.2
N$121
  Top 0.61: IC3.DIO3 33.43,8.38 33.43,4.95 36.09,2.29 JP4.4
  Bottom 0.61: IC4.UTXD 36.09,11.43 36.09,2.29 JP4.4
N$122
  Top 0.61: IC3.DIO4 35.33,8.38 35.33,5.71 38.76,2.29 JP4.3
N$123
  Top 0.61: JP2.7 41.35,30.86 | 41.35,30.86 38.38,30.86 37.62,30.1 37.62,28.57 IC3.ANA | 41.35,30.86 41.35,26.65 AP1.1
  Bottom 0.61: IC4.GPIO0 40.28,24.38 40.28,33.53 41.05,34.29 JP2.7
N$124
  Bottom 0.61: JP2.1 26.11,30.79 C8.1 27.9,26.67 | 27.9,26.67 C7.1 | C7.1 27.9,24.5 IC4.VCC | C7.1 27.71,26.67 27.9,26.67
N$125
  Top 0.61: C5.2 C6.2 44.4,15.4 45,16 45,19.4 | 45,19.4 45,21.72 | 45,21.72 45,33.29 JP2.8 | 45,21.72 41.81,21.72 39.52,24 39.52,28.19 IC3.GND@2 | SJ2.1 43.56,19.4 45,19.4
N$126
  Top 0.61: JP2.6 38.76,34.29 35.33,30.86 35.33,28.57 IC3.GND@1 35.4,28.17 35.4,25.8 41.7,19.5 SJ2.2
  Bottom 0.61: IC4.GPIO2 38.38,24.38 38.38,33.91 38.76,34.29 JP2.6
N$127
  Top 0.61: JP4.2 41.05,2.29 41.05,3.43 37.62,6.86 37.62,8.38 IC3.DIO5
  Bottom 0.61: JP4.2 41.05,2.29 40.28,3.05 40.28,11.43 IC4.GND 40,11.8 40,20 38,22 26,22 25.1,22.9 C7.2 C8.2
S$2
  Top 0.61: AP6.1 64.85,64.15 64.85,68.36 61.88,68.36 61.12,67.6 61.12,66.08 IC13.ANA

## Text on the board
tPlace: S | I | O | C | G | A | S | I | O | C | G | A | S | I | O | C | G | A | S | I | O | C | G | A | GND | GND | GND | GND | R | 0 | 1 | 2 | 3 | 4 | 5 | 3V3 | R | 0 | 1 | 2 | 3 | 4 | 5 | 3V3 | R | 0 | 1 | 2 | 3 | 4 | 5 | 3V3 | R | 0 | 1 | 2 | 3 | 4 | 5 | 3V3 | S | I | O | C | G | A | S | I | O | C | G | A | S | I | O | C | G | A | S | I | O | C | G | A | GND | GND | GND | GND | R | 0 | 1 | 2 | 3 | 4 | 5 | 3V3 | R | 0 | 1 | 2 | 3 | 4 | 5 | 3V3 | R | 0 | 1 | 2 | 3 | 4 | 5 | 3V3 | R | 0 | 1 | 2 | 3 | 4 | 5 | 3V3
bPlace: V | 14 | 12 | 13 | 15 | 2 | 0 | V | 14 | 12 | 13 | 15 | 2 | 0 | V | 14 | 12 | 13 | 15 | 2 | 0 | V | 14 | 12 | 13 | 15 | 2 | 0 | ANT | GND | ANT | GND | ANT | GND | ANT | GND | EN | 18 | RX | TX | EN | 18 | RX | TX | EN | 18 | RX | TX | EN | 18 | RX | TX | V | 14 | 12 | 13 | 15 | 2 | 0 | V | 14 | 12 | 13 | 15 | 2 | 0 | V | 14 | 12 | 13 | 15 | 2 | 0 | V | 14 | 12 | 13 | 15 | 2 | 0 | ANT | GND | ANT | GND | ANT | GND | ANT | GND | EN | 18 | RX | TX | EN | 18 | RX | TX | EN | 18 | RX | TX | EN | 18 | RX | TX
Milling: vCUT | vCUT | vCUT | vCUT